# Altium PCB 单相本地卡表_SX-MC6017A-200606.PcbDoc (part 1 of 2)
Units mm, origin at the board's own origin, x right, y up, seen from the top; angles counter-clockwise.
Board outline 98.55 x 94.74 mm, 2 copper layers (Top Layer, Bottom Layer); 169 components, 155 nets, 535 pads, 382 vias.
Unrouted connection lines stored in the file: 1.
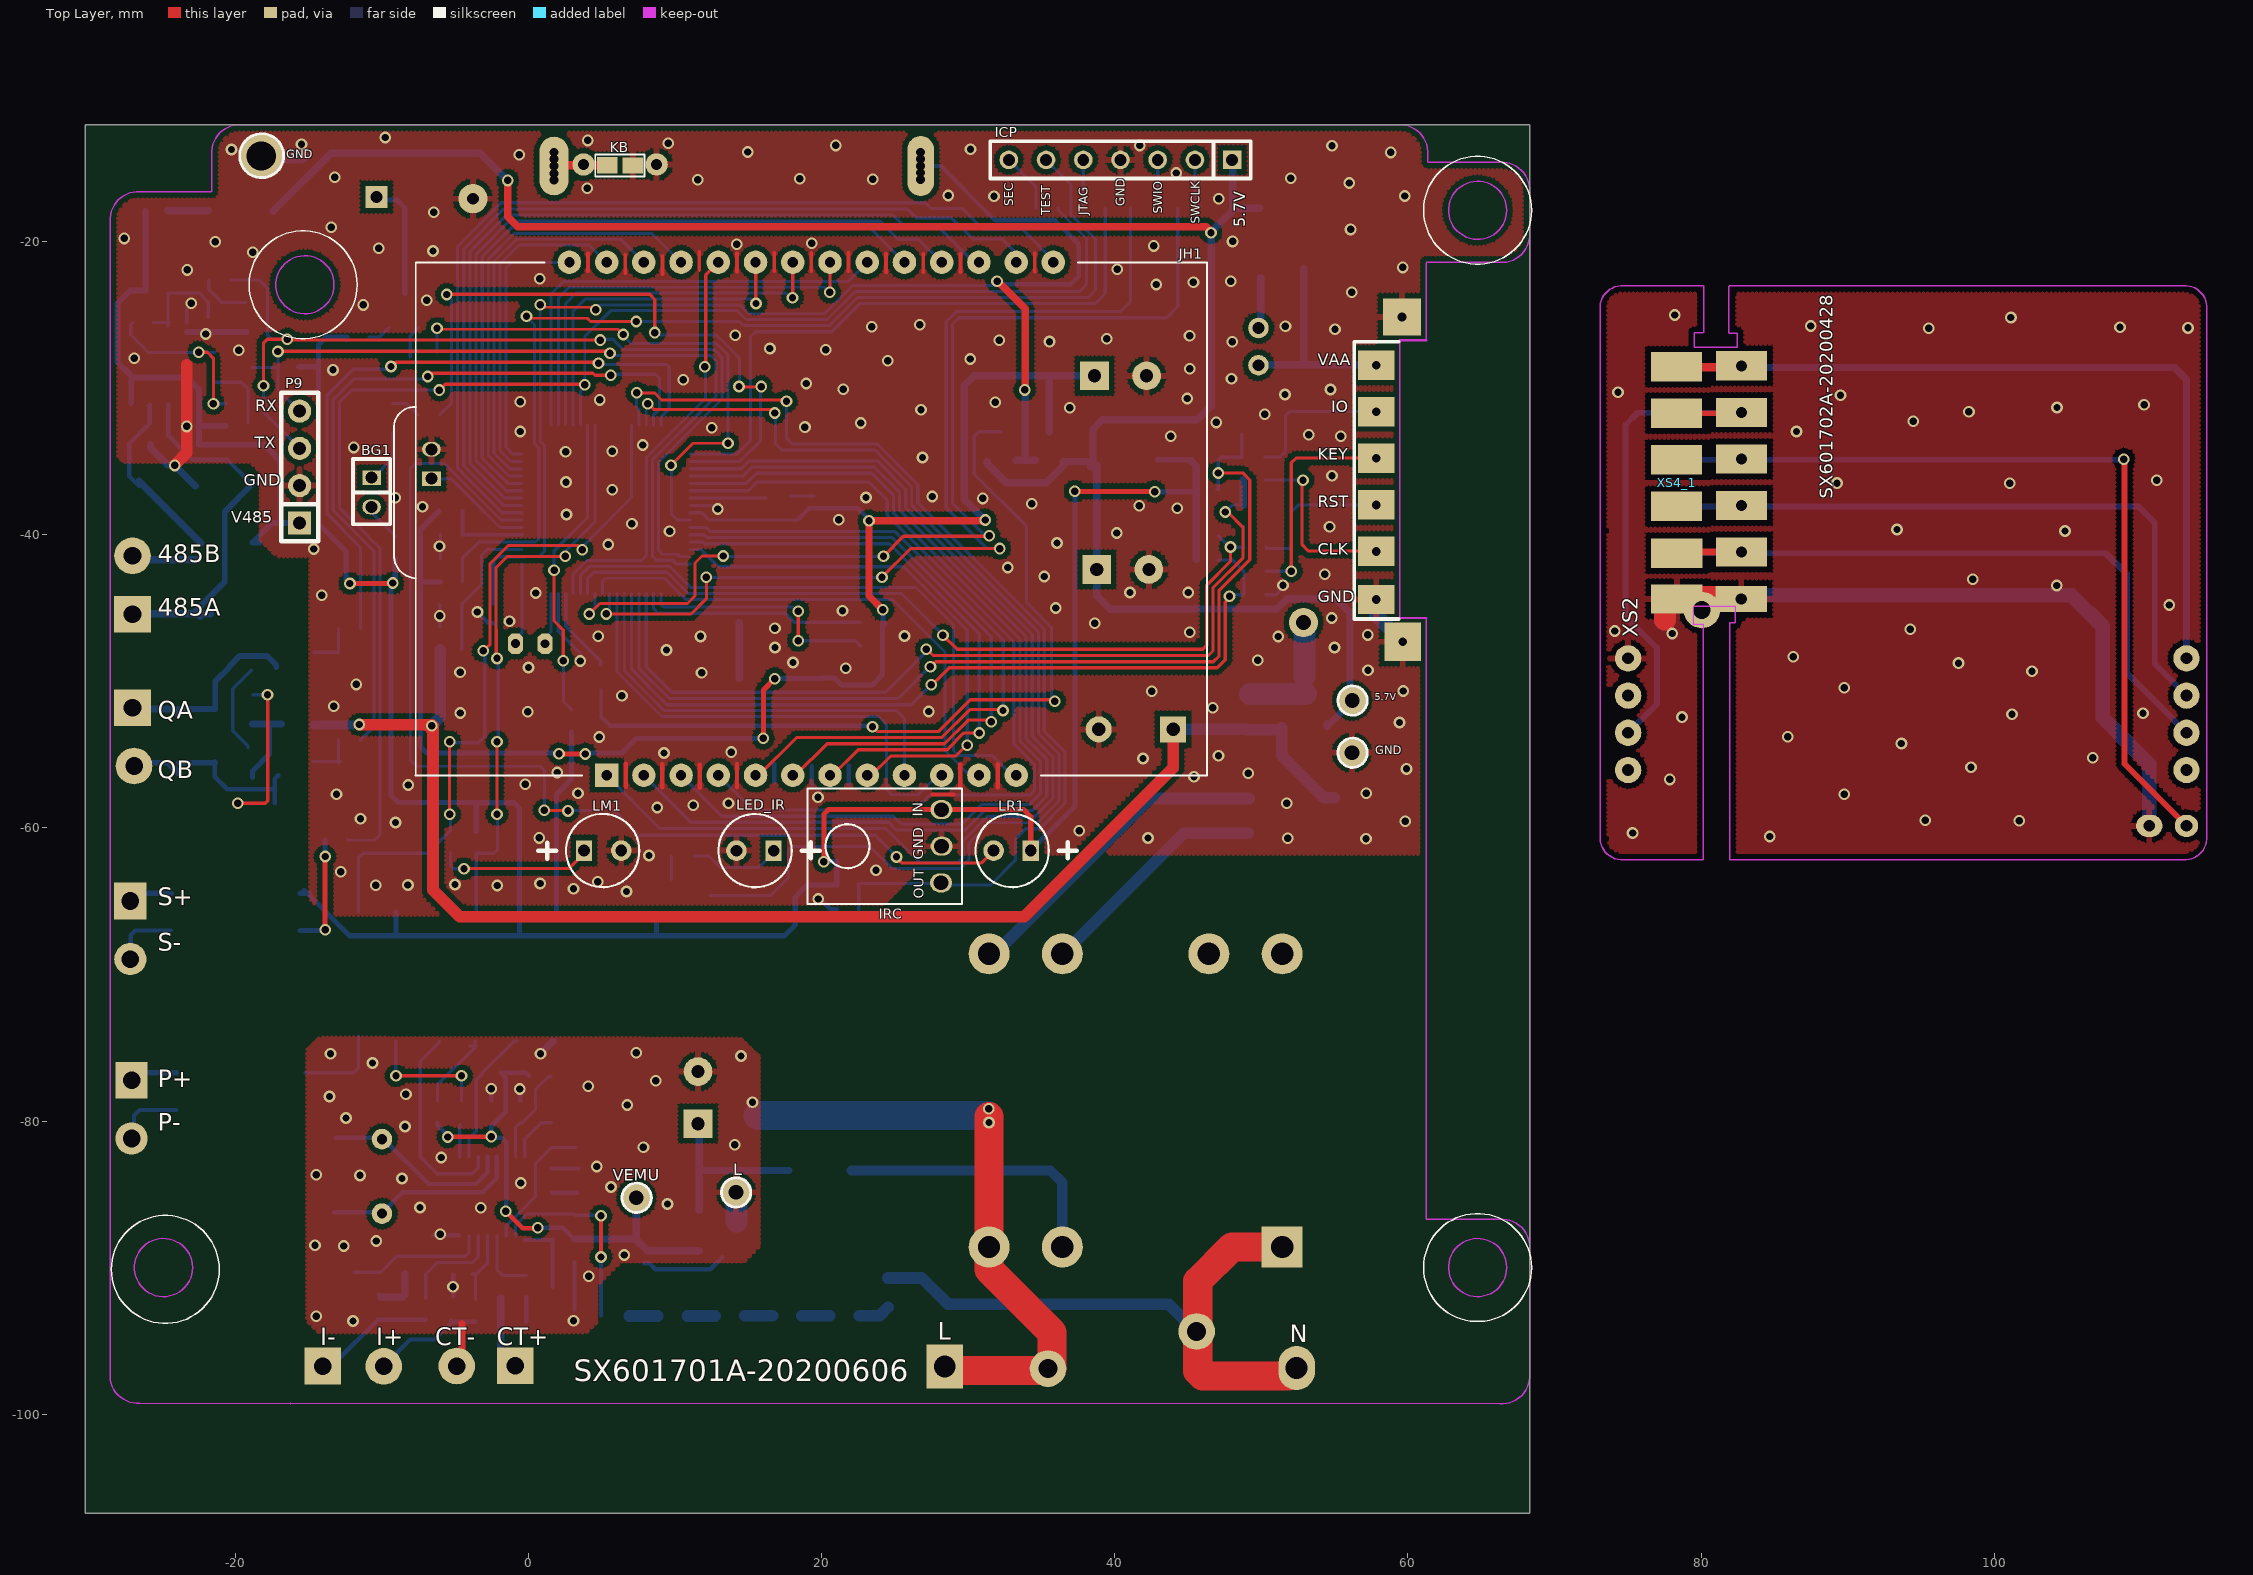
[diagram p0: Top Layer view]
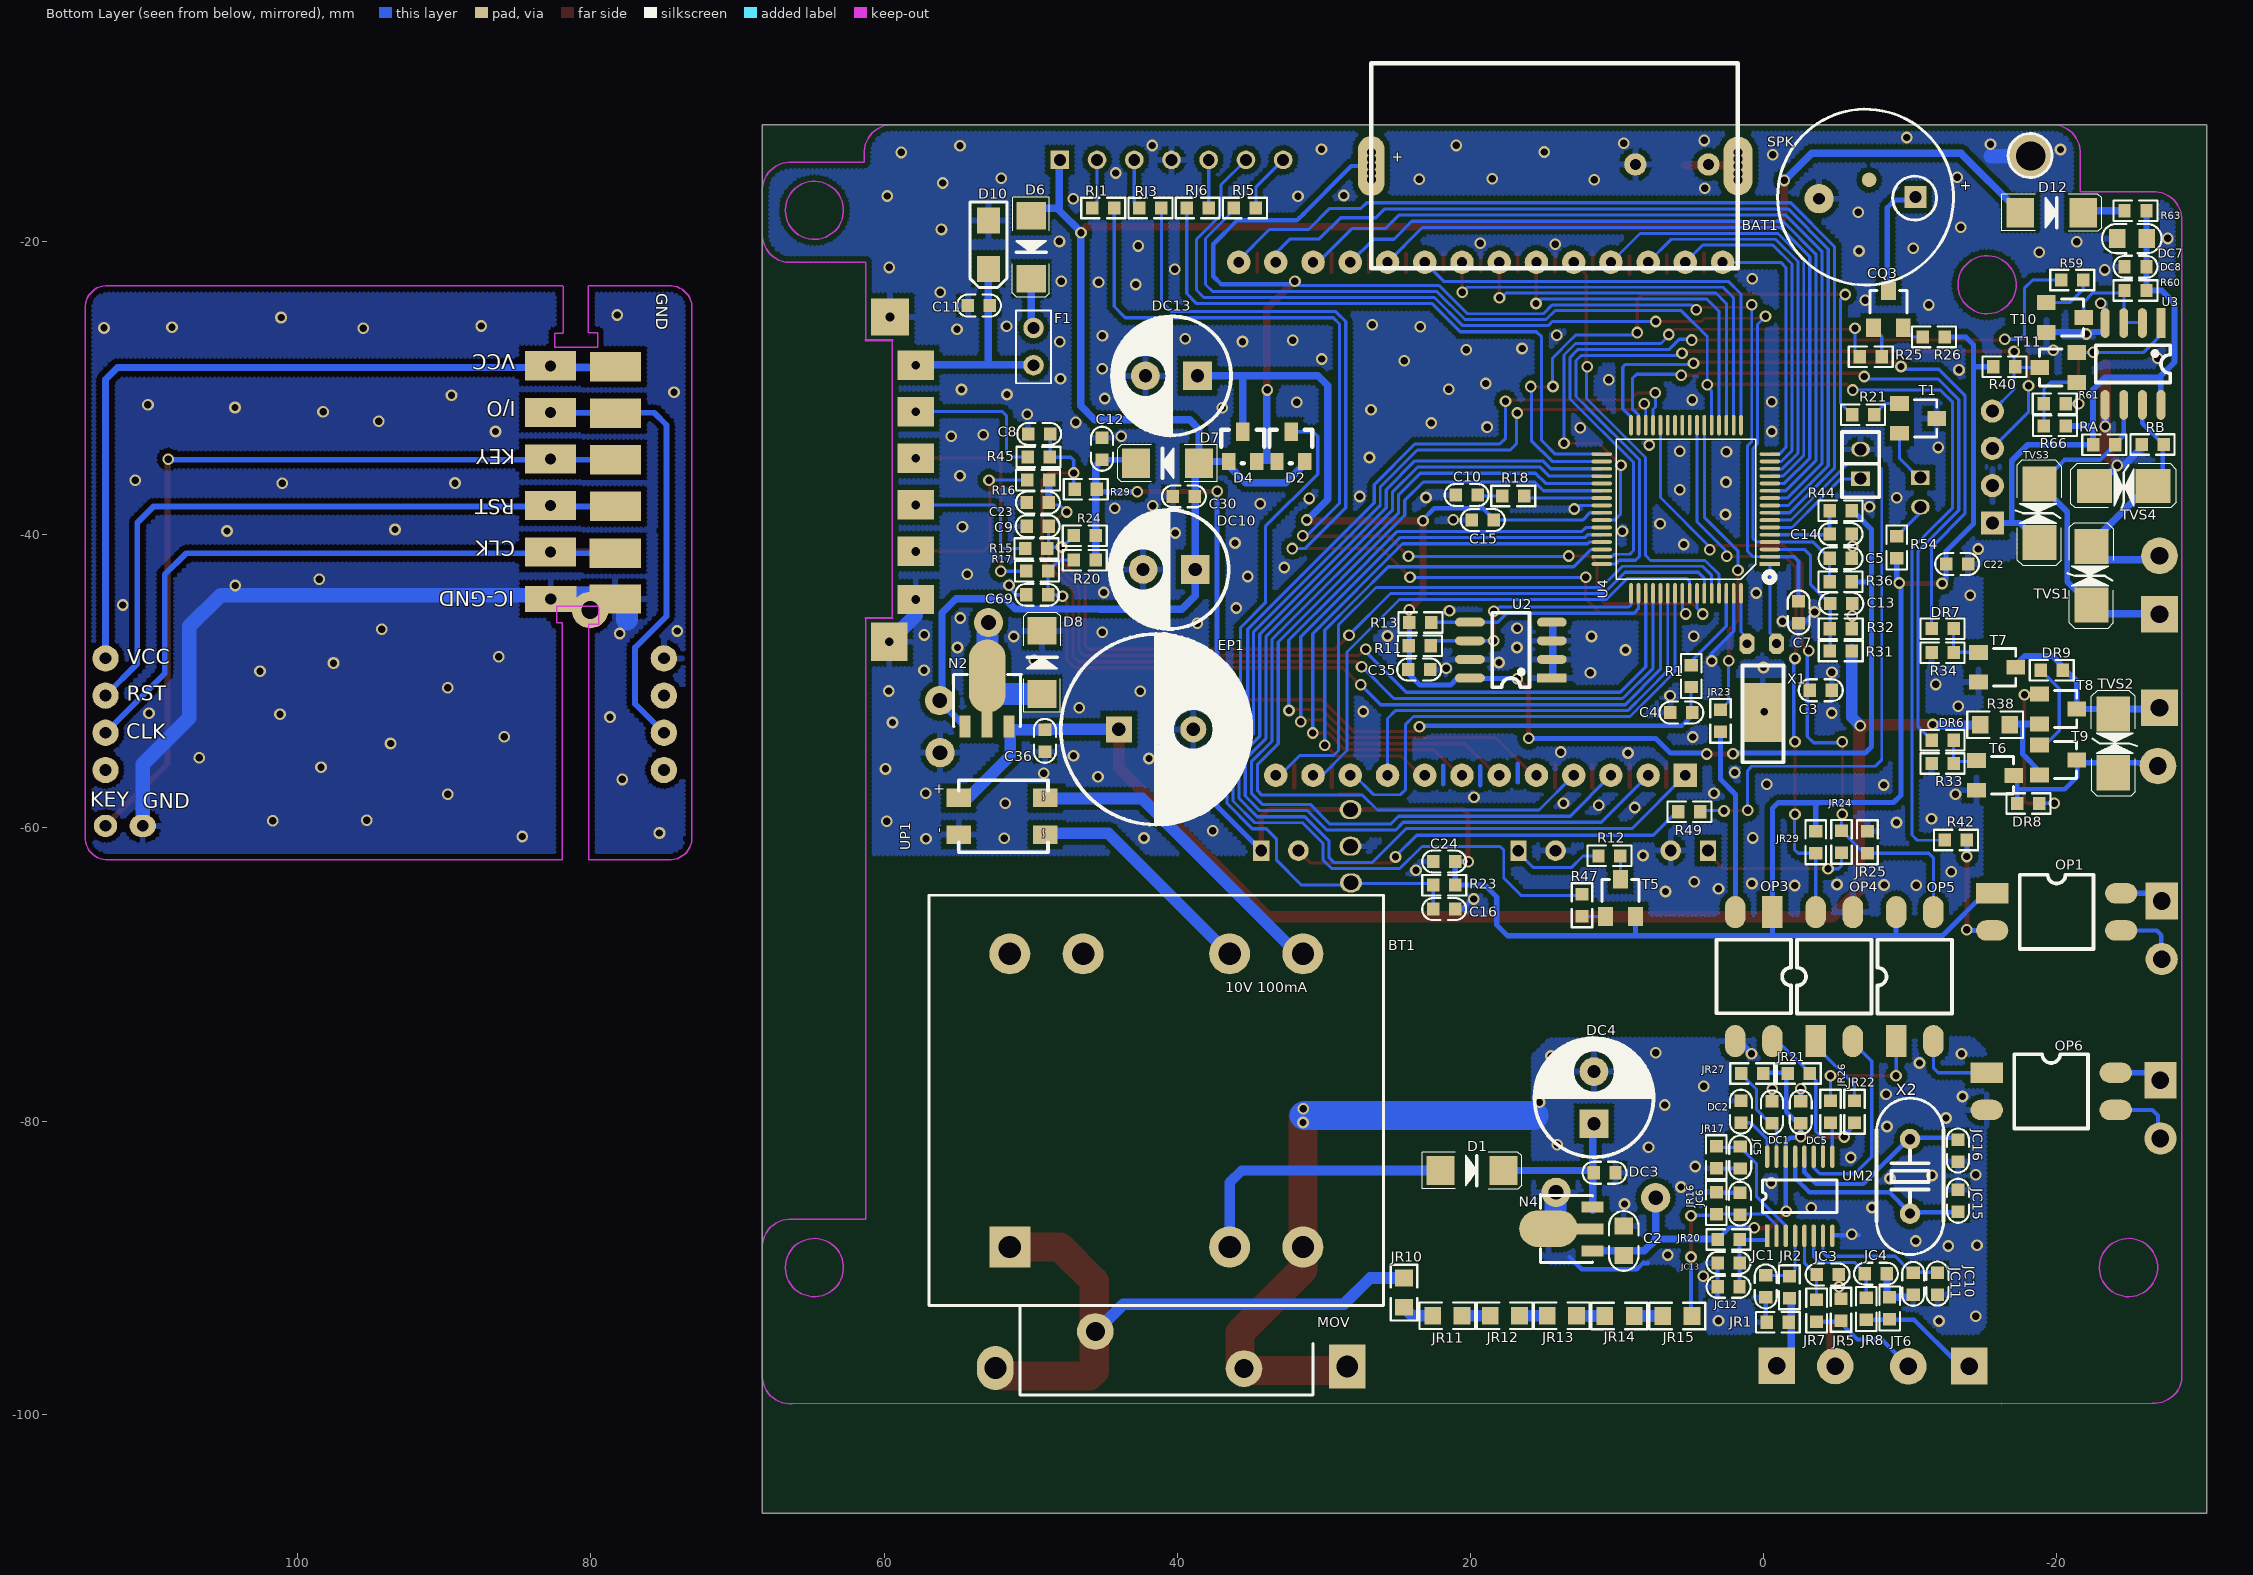
[diagram p1: Bottom Layer view, seen from below]

## Layer stack, top to bottom
Top Layer: signal copper 0.0356
Dielectric: dielectric 0.32, FR-4, Dk 4.8
Bottom Layer: signal copper 0.0356

## Board outline
-30.246,-106.758 68.306,-106.758 68.306,-12.016 -30.246,-12.016

## Design rules (kind name [scope] priority, off if disabled: settings)
Clearance Clearance_1 [InPoly] p1: gap=0.35
Clearance [All] p2: gap=0.2
PolygonConnect PolygonConnect_1 [IsVia] p1: connectstyle=Direct reliefconductorwidth=0.254 reliefentries=4 polygonreliefangle="90 Angle"
PolygonConnect [All] p2: connectstyle=Relief reliefconductorwidth=0.4 reliefentries=4 polygonreliefangle="90 Angle"
RoutingVias [All] p1: holewidth=0.5 width=0.8 viastyle="Through Hole" minholewidth=0.5 minwidth=0.8 maxholewidth=0.5 maxwidth=0.8
SilkscreenOverComponentPads [All] p1: minsilkscreentomaskgap=0.254
SolderMaskExpansion [All] p1: expansion=0.102
Width [All] p1: maxlimit=3 minlimit=0.2 preferedwidth=0.2
27 further rules are at their usual default settings.

## Components (designator, comment, footprint, x,y, rotation, side; value= is the part's Value field where it differs from the comment)
BAT1 "ER14250/无焊脚" BETTER1 26.754,-14.838 r180 bottom
BG1 "Comment" SIP2-2 -10.712,-36.101 r270 top
BT1 "DB-2-04A-10" DB-2-04A 31.419,-68.592 r180 bottom locked
C2 "106/10V" C0805 9.533,-87.166 r270 bottom
C3 "104" C0603 -3.162,-50.603 r180 bottom
C4 "105/16V" C0603 4.852,-52.133 r0 bottom
C5 "0.01uF/50V" C0603 -4.512,-41.603 r180 bottom
C7 "0.1μF/50V" C0603 -2.403,-44.544 r270 bottom
C8 "102" C0603 50.167,-33.119 r180 bottom
C9 "102" C0603 50.272,-39.412 r180 bottom
C10 "0.1μF/50V/X7R" C0603 21,-37.284 r180 bottom
C11 "104/50V" C0603 52.775,-24.356 r0 bottom
C12 "475/10V" C0603 45.125,-33.381 r270 bottom
C13 "0.01uf/50v" C0603 -4.559,-44.696 r180 bottom
C14 "0.1μF/50V/X7R" C0603 -4.512,-39.952 r180 bottom
C15 "0.1μF/50V/X7R" C0603 19.901,-38.993 r180 bottom
C16 "102" C0603 22.531,-65.541 r180 bottom
C22 "0.1μF/50V/X7R" C0603 -12.465,-41.992 r180 bottom
C23 "102" C0603 50.251,-37.804 r180 bottom
C24 "475/10V" C0603 21.03,-62.29 r0 bottom
C30 "0.1μF/50V/X7R" C0603 40.289,-37.376 r180 bottom
C35 "475/10V" C0603 24.236,-49.19 r180 bottom
C36 "0.1μF/50v" C0603 49.024,-54.805 r90 bottom
C69 "102" C0603 50.302,-44.092 r180 bottom
CQ3 "S8550" SOT-23 -8.527,-23.339 r180 bottom
CTC "CON2" PADX2#1 -1.108,-96.695 r180 top
D1 "M7" L-SMD 22.041,-83.373 r180 bottom
D2 "BAV70" BAV70 31.297,-35.123 r0 bottom
D4 "BAV70" BAV70 34.588,-35.128 r0 bottom
D6 "M7" L-SMD 49.966,-18.229 r270 bottom
D7 "M7" L-SMD 38.51,-35.118 r0 bottom
D8 "M7" L-SMD 49.221,-50.851 r90 bottom
D10 "TCLLZ5V6" LL-34 52.879,-18.552 r270 bottom
D12 "M7" L-SMD -17.526,-18.019 r180 bottom
DC1 "0.1μF/50V/X7R" C0603 -0.582,-78.652 r270 bottom
DC2 "0.1μF/50V/X7R" C0603 1.54,-80.109 r90 bottom
DC3 "0.01μF/50V" C0603 11.592,-83.528 r180 bottom
DC4 "100μF/25V/RD" 3.5×8×11.5 11.562,-80.177 r90 bottom
DC5 "0.1μF/50V/X7R" C0603 -2.546,-80.143 r90 bottom
DC7 "475/10v" C0805 -26.145,-19.787 r0 bottom
DC8 "0.1uf/50V/X7R" C0603 -26.136,-21.714 r0 bottom
DC10 "RD/10V/220μF" 3.5×8×11.5 38.766,-42.364 r0 bottom
DC13 "RD/10V/220μF" 3.5×8×11.5 38.61,-29.154 r0 bottom
DR6 "1K" 0603 -12.973,-54.021 r0 bottom
DR7 "1K" 0603 -11.473,-46.401 r180 bottom
DR8 "2K" 0603 -17.33,-58.329 r180 bottom
DR9 "2K" 0603 -20.425,-49.246 r0 bottom
EP1 "RD/25V/1000" 5.0×12.5×20 41.439,-53.273 r180 bottom
F1 "MZ11-06A300-600RM" CON2 49.798,-27.158 r90 bottom
FLQ "CON2" PADX2#2 -27.088,-80.722 r90 top
FLQ "CON2" PADX2#2 -27.173,-68.482 r90 top
FLQ "CON2" PADX2#3 -10.186,-96.695 r180 top
ICP "CON7" SIP7 48.007,-14.419 r180 top
IRC "IRM-3638J7F116-L(CLW)-698/HS0038B" RECEIVER 24.948,-61.244 r90 top locked
JC1 "0.01/50V" C0603 -0.161,-90.532 r270 bottom
JC3 "103/50V" C0603 -3.631,-90.47 r180 bottom
JC4 "103/50V" C0603 -8.426,-90.415 r0 bottom
JC5 "103/50V" C0603 1.587,-83.236 r90 bottom
JC6 "103/50V" C0603 1.602,-86.383 r90 bottom
JC10 "0.1μF/50V/X7R" C0603 -11.871,-91.839 r90 bottom
JC11 "475/10V" C0603 -10.218,-91.857 r90 bottom
JC12 "475/10V" C0603 3.132,-91.309 r180 bottom
JC13 "0.1μF/50V/X7R" C0603 1.631,-89.679 r0 bottom
JC15 "22pF/25V" C0603 -13.279,-84.689 r270 bottom
JC16 "22pF/25V" C0603 -13.271,-81.26 r270 bottom
JH1 "液晶GV17980A-HPP-WG Model" "GV17980A-HPP-WG MODEL" -7.703,-56.417 r0 top locked
JR1 "5R1/1%" 0603 -0.234,-93.724 r180 bottom
JR2 "1K/1%" 0603 -1.772,-90.591 r270 bottom
JR5 "100R/1%" 0603 -5.289,-93.623 r90 bottom
JR7 "1K/1%" 0603 -3.627,-93.682 r90 bottom
JR8 "1K/1%" 0603 -7.021,-93.566 r90 bottom
JR10 "200K/1%" 0805 24.523,-92.708 r90 bottom
JR11 "200K/1%" 0805 20.56,-93.279 r0 bottom
JR12 "200K/1%" 0805 16.647,-93.286 r0 bottom
JR13 "200K/1%" 0805 12.748,-93.286 r0 bottom
JR14 "200K/1%" 0805 10.823,-93.3 r180 bottom
JR15 "200K/1%" 0805 4.873,-93.3 r0 bottom
JR16 "1.2K/1%" 0603 3.211,-86.347 r90 bottom
JR17 "1.2K/1%" 0603 3.211,-83.222 r90 bottom
JR20 "10R" 0603 1.631,-88.082 r0 bottom
JR21 "680R" 0603 -3.163,-76.75 r0 bottom
JR22 "1K" 0603 -6.216,-78.609 r270 bottom
JR23 "1K" 0603 2.933,-51.943 r270 bottom
JR24 "3K" 0603 -5.332,-60.199 r270 bottom
JR25 "10K" 0603 -7.093,-60.229 r270 bottom
JR26 "1K" 0603 -4.57,-78.609 r270 bottom
JR27 "10K" 0603 1.511,-76.75 r180 bottom
JR29 "680R" 0603 -3.57,-61.729 r90 bottom
JT6 "100R/1%" 0603 -8.61,-93.529 r90 bottom
KB "JD" JD 7.012,-14.804 r180 top
L "1PIN" PAD#1 28.395,-96.735 r90 bottom
LED_IR "IRM-3638J7F116-L(CLW)/TSAL6200" LED-3 15.461,-61.547 r180 top locked
LM1 "LED5红" LED-3 5.045,-61.547 r0 top locked
LR1 "LED5黄" LED-3 33.007,-61.543 r180 top locked
MOV "20K681" MOV-20+ 46.037,-94.389 r180 bottom
N "1PIN" PAD#2 52.401,-96.848 r90 bottom
N2 "SE8801BH-SOT-23" 8801#1 54.471,-53.082 r180 bottom (schematic designator N4)
N4 "SE8801BH-SOT-23" 8801#2 11.662,-88.859 r90 bottom
OP1 "816S(D档)" SMD-4 -15.606,-64.457 r180 bottom
OP3 "816S(D档)" SMD-4 -0.615,-65.74 r270 bottom
OP4 "816S(D档)" SMD-4 -3.566,-74.54 r90 bottom
OP5 "816S(D档)" SMD-4 -9.057,-74.54 r90 bottom
OP6 "816S(D档)" SMD-4 -15.239,-76.702 r180 bottom
P9 "RS485_XH-04" IDC4 -15.62,-39.184 r90 top
R1 "10R" 0603 4.925,-50.385 r90 bottom
R11 "5.1K" 0603 24.19,-47.572 r180 bottom
R12 "101" 0603 9.754,-61.906 r0 bottom
R13 "5.1K" 0603 24.156,-45.984 r180 bottom
R15 "681" 0603 48.855,-40.935 r0 bottom
R16 "681" 0603 48.742,-36.267 r0 bottom
R17 "1K" 0603 48.81,-42.479 r0 bottom
R18 "100R" 0603 16.32,-37.354 r0 bottom
R20 "20K" 0603 45.558,-41.728 r0 bottom
R21 "5.1K" 0603 -6.051,-31.806 r180 bottom
R23 "10k" 0603 21.031,-63.903 r0 bottom
R24 "20K" 0603 45.558,-40.057 r0 bottom
R25 "3K" 0603 -6.569,-27.854 r180 bottom
R26 "51R" 0603 -10.879,-26.497 r180 bottom
R29 "20K" 0603 45.488,-36.893 r0 bottom
R31 "75K/1%" 0603 -4.522,-47.932 r180 bottom
R32 "12K/1%" 0603 -6.022,-46.407 r0 bottom
R33 "3K" 0603 -12.973,-55.599 r0 bottom
R34 "3K" 0603 -11.473,-48.04 r180 bottom
R36 "1K" 0603 -4.512,-43.209 r180 bottom
R38 "20R" 0805 -14.803,-52.955 r180 bottom
R40 "5.1k" 0603 -15.69,-28.533 r180 bottom
R42 "1.2K" 0603 -12.381,-60.825 r180 bottom
R44 "5.1K" 0603 -4.512,-38.361 r180 bottom
R45 "681" 0603 48.705,-34.687 r0 bottom
R47 "3K" 0603 12.383,-64.528 r270 bottom
R49 "3K" 0603 4.3,-58.898 r0 bottom
R54 "510R" 0603 -9.099,-40.111 r270 bottom (schematic designator R21)
R59 "5.1k" 0603 -20.32,-22.613 r180 bottom
R60 "10k" 0603 -24.636,-23.332 r180 bottom
R61 "5.1k" 0603 -19.129,-31.064 r180 bottom (schematic designator R66)
R63 "10R" 0603 -26.136,-17.894 r0 bottom
R66 "5.1k" 0603 -19.138,-32.566 r180 bottom
RA "10K" 0603 -23.998,-33.854 r0 bottom
RB "10K" 0603 -25.799,-33.84 r180 bottom
REAY1 "继电器HEF19-90" PADX2#4 -27.023,-41.435 r270 top
REAY1 "继电器HEF19-90" PADX2#5 -27.023,-55.3 r90 top
RJ1 "100R" 0603 44.297,-17.704 r0 bottom
RJ3 "100R" 0603 41.075,-17.704 r0 bottom
RJ5 "100R" 0603 34.63,-17.704 r0 bottom
RJ6 "100R" 0603 37.853,-17.704 r0 bottom
SPK "HYT-1205_5V有源一体" FM -6.964,-16.961 r270 bottom
T1 "2SA812" SOT-23 -11.826,-32.055 r270 bottom
T5 "2SA812" SOT-23 9.754,-63.504 r180 bottom
T6 "L8050HQ" SOT-23 -17.076,-56.411 r270 bottom
T7 "L8050HQ" SOT-23 -17.215,-49.034 r270 bottom
T8 "L8550HQ" SOT-23 -21.377,-51.887 r270 bottom
T9 "L8550HQ" SOT-23 -21.374,-55.363 r270 bottom
T10 "L8050HQ" SOT-23 -21.847,-25.171 r270 bottom
T11 "L8050HQ" SOT-23 -18.847,-28.581 r90 bottom
TVS1 "SMBJ8.5CA" 3528 -22.377,-40.796 r270 bottom
TVS2 "SMBJ24CA" 3528 -23.87,-56.232 r90 bottom
TVS3 "SMBJ5.0CA" 3528 -18.833,-36.523 r270 bottom
TVS4 "SMBJ5.0CA" 3528 -22.579,-36.667 r180 bottom
U2 "BM24C16" SO-8 17.217,-47.805 r0 bottom
U3 "485芯片/有极性" SO-8 -25.158,-28.33 r270 bottom
U4 "HT6017" STM8 -0.445,-41.996 r90 bottom (schematic designator U1)
UM2 "HT7017" SOP16-7059 -0.256,-87.829 r90 bottom
UP1 "MB6S" "MB1S -MB6S_SOIC-4" 49.006,-60.453 r90 bottom
X1 "32768Hz" XTAL2 0.896,-47.722 r180 bottom
X2 "6MHz" XTAL1-3 -9.988,-83.78 r270 bottom
XS2 "U.S.PAT 6.336.588" KZ-1 75.018,-56.048 r90 top
XS4_1 "" SIP6C 76.323,-25.358 r270 top locked
? "MUP-C837" CAR 49.494,-34.879 r270 top
? "Comment" SIP2-2 -6.625,-36.166 r90 bottom

## Footprints (in the part's own frame and the unit in brackets; to place one, negate y for a bottom-side part, rotate by r counter-clockwise, add the part's x,y. Pads: shape width x height; smd on the part's side, far side on the other; paste and mask are expansions set on the pad)
3.5×8×11.5 [mil]
  rect 77x77 hole 35.43: 1(0,0)
  round 77 hole 35.43: 2(140,0)
  silkscreen extent -90,-160 230,160
5.0×12.5×20 [mil]
  rect 70x70 hole 35.43: 1(-100,0)
  round 70 hole 35.43: 2(100,0)
  silkscreen extent -256,-256 256,256
0603 [mm]
  rect 0.85x0.9 smd: 1(0,0) 2(1.5,0)
  silkscreen extent -0.75,-0.7 2.25,0.7
0805 [mm]
  rect 1.14x1.2 smd: 1(0,0) 2(2,0)
  silkscreen extent -0.9,-0.9 2.9,0.9
3528 [mm]
  rect 2.4x2.3 smd: 1(0,0) 2(4,0)
  silkscreen extent -1.6,-1.62 5.6,1.5
8801#1 [mil]
  rect 30x60 smd: 1(0,0) 3(118,0)
  round 0 smd: 2(59,0)
  rect 30x100 smd: 2(59,20)
  oval 98.43x196.85 smd: 2(59.93,135.22)
  silkscreen extent -31,0 151,140
8801#2 [mil]
  rect 30x60 smd: 1(0,0) 3(118,0)
  round 0 smd: 2(59,0)
  rect 30x100 smd: 2(59,20)
  oval 98.43x157.48 smd: 2(59.84,118.11)
  silkscreen extent -31,0 151,140
BAV70 [mil]
  rect 36x45 smd: 1(74.61,-4.91) 3(-0.39,-4.91)
  rect 36x50 smd: 2(36.61,-84.91)
  silkscreen extent -20,-90 95,0
BETTER1 [mil]
  round 24 hole 24: 1(0,19) 1(0,-36) 1(0,-18) 1(0,0) 1(0,37) 2(985,0) 2(985,-20) 2(985,-37) 2(985,37) 2(985,19)
  oval 71x161.42 hole 24: 1(0,0)
  oval 78.74x157.48 hole 24: 2(985,0)
  silkscreen extent 0,-275 984,276
C0603 [mm]
  rect 0.85x0.9 smd: 1(0,0) 2(1.5,0)
  silkscreen extent -0.75,-0.75 2.25,0.75
C0805 [mm]
  rect 1.14x1.27 smd: 1(2,0) 2(0,0)
  silkscreen extent -1.02,-1 3.05,1
CAR [mm]
  rect 2x2.5 hole 0.6: 1(-6.45,8.34) 2(-3.272,8.347) 3(-0.097,8.347) 4(3.078,8.347) 5(6.253,8.347) 6(9.537,8.345)
  silkscreen extent -8.05,6.83 10.87,9.86
CON2 [mm]
  round 1.4 hole 0.8: 1(-1.272,0.003) 2(1.268,0.003)
  silkscreen extent -2.51,-1.2 2.46,1.19
DB-2-04A [mil]
  rect 110x110 hole 60: 1(-787.4,-787.4)
  round 110 hole 60: 2(-196.85,-787.4) 3(0,-787.4) 4(0,0) 5(-196.85,0) 6(-590.55,0) 7(-787.4,0)
  silkscreen extent -1004,-945 217,157
FM [mm]
  rect 1.5x1.5 hole 0.8: 1(-0.012,3.413)
  round 2 hole 0.8: 2(0.108,-3.167)
  silkscreen extent -6,-5.99 6,6
"GV17980A-HPP-WG MODEL" [mm]
  round 1.6 hole 0.7: 1(10.489,35.005) 2(13.029,35.005) 3(15.569,35.005) 4(18.109,35.005) 5(20.649,35.005) 6(23.189,35.005) 7(25.729,35.005) 8(28.269,35.005) 9(30.809,35.005) 10(33.349,35.005) 11(35.889,35.005) 12(38.429,35.005) 13(40.969,35.005) 14(43.509,35.005) 15(40.97,0.004) 16(38.43,0.004) 17(35.89,0.004) 18(33.35,0.004) 19(30.81,0.004) 20(28.27,0.004) 21(25.73,0.004) 22(23.19,0.004) 23(20.65,0.004) 24(18.11,0.004) 25(15.57,0.004)
  rect 1.6x1.6 hole 0.7: 26(13.03,0.004)
  silkscreen extent -1.49,0 54,35.01
IDC4 [mil]
  rect 62x62 hole 35: 1(0,0)
  round 62 hole 35: 2(100,0) 3(200,0) 4(300,0)
  silkscreen extent -50,-50 350,50
JD [mm]
  rect 1.4x1.106 smd: 1(1.652,-0.011) 2(-0.096,0.004)
  silkscreen extent -0.89,-0.76 2.46,0.74
KZ-1 [mm]
  round 1.8 hole 0.8: 1(0,0) 2(2.54,0) 3(5.08,0) 4(7.62,0) 6(0,-38.1) 7(2.54,-38.1) 8(5.08,-38.1) 9(7.62,-38.1)
  oval 1.5x1.6 hole 0.8: 5(-3.81,-38.1)
  oval 1.5x1.8 hole 0.8: 11(-3.81,-35.56)
L-SMD [mm]
  rect 1.9x2 smd: A(0,0) K(4.3,0)
  silkscreen extent -1.25,-1.27 5.55,1.25
LED-3 [mm]
  rect 1.1x1.4 hole 0.8: A(-1.26,0.002)
  round 1.4 hole 0.8: K(1.28,0.002)
  silkscreen extent -4.39,-2.5 2.51,2.5
LL-34 [mil]
  rect 70x62 smd: 1(0,0) 2(130,0)
  silkscreen extent -50,-50 180,50
"MB1S -MB6S_SOIC-4" [mm]
  rect 1.254x1.654 smd: 1(0,0) 2(2.5,0) 3(2.5,5.9) 4(0,5.9)
  silkscreen extent -1.2,-0.2 3.7,5.9
MOV-20+ [mm]
  round 2.5 hole 1.3: 1(0.453,0.034) 2(10.6,-2.5)
  silkscreen extent -4.7,-4.3 15.31,1.8
PAD#1 [mm]
  rect 3x2.5 hole 1.5: 1(0,0)
PAD#2 [mm]
  oval 3x2.5 hole 1.5: 1(0,0)
PADX2#1 [mm]
  rect 2.5x2.5 hole 1.2: 1(-0.199,0.002)
  round 2.5 hole 1.2: 2(3.795,0.021)
PADX2#2 [mm]
  round 2.2 hole 1.2: 1(-0.468,0)
  rect 2.5x2.2 hole 1.2: 2(3.5,0)
PADX2#3 [mm]
  round 2.5 hole 1.2: 1(-0.304,0.04)
  rect 2.5x2.5 hole 1.2: 2(3.86,0.021)
PADX2#4 [mm]
  round 2.5 hole 1.2: 1(0,0)
  rect 2.5x2.5 hole 1.2: 2(3.994,0)
PADX2#5 [mm]
  round 2.5 hole 1.2: 1(-0.476,-0.106)
  rect 2.5x2.5 hole 1.2: 2(3.5,0)
RECEIVER [mm]
  oval 1.3x1.5 hole 1: 1(-2.503,-3.193) 2(-0.003,-3.229) 3(2.492,-3.223)
  silkscreen extent -3.94,-4.63 3.93,5.91
SIP2-2 [mm]
  rect 1x1.27 hole 0.813: 1(0,0)
  oval 1x1.27 hole 0.813: 2(2,0)
  silkscreen extent -1.27,-1.27 3.18,1.27
SIP6C [mm]
  rect 2.03x3.5 all layers, no hole: 1(15.9,2.024)
  rect 2.032x3.5 all layers, no hole: 2(12.7,2) 3(9.525,2) 4(6.35,2) 5(3.175,2)
  rect 2x3.5 all layers, no hole: 6(19.018,2.024)
SIP7 [mil]
  rect 50x50 hole 32: 1(0,0)
  round 50 hole 32: 2(100,0) 3(200,0) 4(300,0) 5(400,0) 6(500,0) 7(600,0)
  silkscreen extent -50,-50 650,50
SMD-4 [mm]
  rect 2.2x1.4 smd: 1(0,0)
  oval 2.2x1.4 smd: 2(0,-2.54) 3(8.8,-2.54) 4(8.8,0)
  silkscreen extent 1.88,-3.81 6.91,1.27
SO-8 [mil]
  rect 80x24 smd: 1(-109.45,77.42)
  oval 80x24 smd: 2(-109.45,27.42) 3(-109.45,-22.58) 4(-109.45,-72.58) 5(110.55,-72.58) 6(110.55,-22.58) 7(110.55,27.42) 8(110.55,77.42)
  silkscreen extent -49,-98 51,102
SOP16-7059 [mm]
  rect 1.54x0.3 smd: 1(0,0)
  oval 1.54x0.3 smd: 2(0,-0.635) 3(0,-1.27) 4(0,-1.905) 5(0,-2.54) 6(0,-3.175) 7(0,-3.81) 8(0,-4.445) 9(5.4,-4.445) 10(5.4,-3.81) 11(5.4,-3.175) 12(5.4,-2.54) 13(5.4,-1.905) 14(5.4,-1.27) 15(5.4,-0.635) 16(5.4,0)
  silkscreen extent 1.6,-4.76 3.8,0.32
SOT-23 [mil]
  rect 40x50 smd: B(-40,-100) C(0,0) E(40,-100)
  silkscreen extent -50,-60 50,0
STM8 [mm]
  rect 0.254x1.4 smd: 1(0,0)
  oval 0.254x1.4 smd: 2(0.5,0) 3(1,0) 4(1.5,0) 5(2,0) 6(2.5,0) 7(3,0) 8(3.5,0) 9(4,0) 10(4.5,0) 11(5,0) 12(5.5,0) 13(6,0) 14(6.5,0) 15(7,0) 16(7.5,0) 33(7.5,11.475) 34(7,11.475) 35(6.5,11.475) 36(6,11.475) 37(5.5,11.475) 38(5,11.475) 39(4.5,11.475) 40(4,11.475) 41(3.5,11.475) 42(3,11.475) 43(2.5,11.475) 44(2,11.475) 45(1.5,11.475) 46(1,11.475) 47(0.5,11.475) 48(0,11.475)
  oval 1.4x0.254 smd: 17(9.475,1.975) 18(9.475,2.475) 19(9.475,2.975) 20(9.475,3.475) 21(9.475,3.975) 22(9.475,4.475) 23(9.475,4.975) 24(9.475,5.475) 25(9.475,5.975) 26(9.475,6.475) 27(9.475,6.975) 28(9.475,7.475) 29(9.475,7.975) 30(9.475,8.475) 31(9.475,8.975) 32(9.475,9.475) 49(-2,9.475) 50(-2,8.975) 51(-2,8.475) 52(-2,7.975) 53(-2,7.475) 54(-2,6.975) 55(-2,6.475) 56(-2,5.975) 57(-2,5.475) 58(-2,4.975) 59(-2,4.475) 60(-2,3.975) 61(-2,3.475) 62(-2,2.975) 63(-2,2.475) 64(-2,1.975)
  silkscreen extent -1.23,-0.31 8.5,10.5
XTAL1-3 [mm]
  round 1.4 hole 0.7: 1(-2.547,0.014) 2(2.533,0.014)
  silkscreen extent -5.34,-2.27 5.33,2.3
XTAL2 [mm]
  oct 1x1.4 hole 0.6: 1(1.79,0.302) 2(-0.228,0.292)
  rect 3x4 smd: 3(0.852,-4.403)
  silkscreen extent -0.54,-7.8 2.26,-1.2

## Part data
BAT1: library part BATTERY1, "电池"
BT1: "32181"
C2 DC4 DC10 DC13 EP1: library part CAPACITOR_2, "电解电容"
C3 C4 C5 C7 C10 C11 C12 C13 C14 C15 C16 C22 C24 C30 C35 C36 DC1 DC2 DC3 DC5 DC7 DC8 JC1 JC3 JC4 JC5 JC6 JC10 JC11 JC12 JC13 JC15 JC16: library part CAP, "电容"
C8 C9 C23 C69: library part CAP, "Capacitor"
CQ3 T9: library part PNP
CTC FLQ FLQ FLQ ICP: "Connector"
D1 D6 D7 D8 D12: library part DIODE, "二极管"
D2 D4: "Diode AKA"
D10: library part "DIODE TUNNEL", "Diode Tunnel"
DR6 DR7 DR8 DR9 R21 R24 R25 R26 R29 R33 R34 R38 R54 R61 R66: library part RES
F1: library part VARISTOR
IRC: library part HS0038B, "红外接收管"
JH1: library part TS-H-0716S
JR1 JR2 JR5 JR7 JR8 JR10 JR11 JR12 JR13 JR14 JR15 JR16 JR17 JR20 JR21 JR22 JR23 JR24 JR25 JR26 JR27 JR29 JT6 R1 R11 R12 R13 R15 R16 R17 R18 R20 R23 R31 R32 R36 R40 R42 R44 R45 R47 R49 R59 R60 R63 RA RB RJ1 RJ3 RJ5 RJ6: library part RES2, "电阻"
LED_IR: library part LAMP, "红外发光管"
LM1 LR1: library part LED, "发光二极管"
MOV: library part RES4, "压敏电阻"
N2 N4: library part LM80L05
OP1 OP3 OP4 OP5 OP6: library part OPTOISO1, "光耦"
P9: library part CON4, "Connector"
REAY1 REAY1: library part CON2, "HFE19-90"
SPK: library part BEEP, "蜂鸣器"
T1 T5: library part PNP, "PNP三极管"
T6 T7 T10 T11: library part NPN
T8: library part PNP, "PNP"
TVS1 TVS2 TVS3 TVS4: library part TVS1, "TVS管"
U2: library part 24C04
U3: library part SP485_1, "485收发芯片"
U4: library part μPD78F0537_1, "单片机HT6017"
UM2: "计量芯片"
UP1: "桥堆"
X1: library part CRYSTAL, "晶振"

## Free pads (board coordinates)
  round 3 hole 2: 0(-18.234,-14.15)
  round 1 smd far side mask+0.762: 0(-7.209,-15.783)
  round 2 hole 1: 0(7.356,-85.234) 0(14.151,-84.861) 0(52.871,-45.986) 0(56.179,-54.863) 0(56.202,-51.31)
  round 2.5 hole 1.2: 0(80.051,-45.133)
  rect 3.5x1.8 hole 0.762: 0(82.738,-44.376)
  round 1.524 hole 0.762: 1(3.752,-14.734) 1(8.737,-14.731)
  rect 3.5x2 hole 0.762: 1(82.758,-28.476) 2(82.758,-34.826) 3(82.758,-38.001) 4(82.758,-41.176) 5(82.758,-31.651)
  rect 2.6x2.5 hole 0.6: 2(59.601,-25.135)
  rect 2.5x2.6 hole 0.6: 2(59.642,-47.294)

## Via types
v1: diameter 0.8, hole 0.5, Top Layer to Bottom Layer, 380 vias
v2: diameter 0.8, hole 0.5, Top Layer to Bottom Layer, tented both sides, 2 vias

## Nets (pads, with @x,y where several pads share a name; then routed paths per layer and width w, separated by ;. In a path a pad name is that pad's centre, name@x,y a point inside that pad or via, vN(x,y) a via of type N, cw(c..) or ccw(c..) an arc to the next point about the centre after c; other vN are vias at no path point)
5.7V: C30.2 D2.3 D4.1 D6.A D7.A D12.A DC10.1 ICP.1 N2.1 pad.0@56.202,-51.31 | length 144.7
  Top Layer w0.5: v1@-1.418,-15.838 v1@-1.412,-15.844 ; v1(-1.412,-15.819) v1@-1.412,-15.844 ; v1@46.617,-19.347 46.245,-18.975 25.93,-18.975 -0.747,-18.975 -1.412,-18.309 v1@-1.412,-15.844
  Bottom Layer w0.5: D12.A@-17.444,-17.936 -13.472,-13.964 ; -13.489,-13.964 -13.472,-13.964 ; -13.468,-13.96 -13.472,-13.964 ; v1@-1.315,-15.941 -3.292,-13.964 -13.472,-13.964 ; D2.3@31.287,-34.998 31.287,-35.149 32.593,-36.456 35.317,-36.456 D4.1@36.694,-35.078 ; D4.1@36.483,-35.003 D7.A@38.395,-35.003 ; D7.A@38.366,-35.374 D7.A@38.766,-35.374 ; D7.A@38.51,-35.118 38.51,-32.787 39.142,-32.155 45.623,-32.155 ; D7.A@38.766,-35.251 D7.A@38.766,-35.374 ; 45.651,-32.136 46.585,-31.203 v1@46.585,-19.387 ; v1@46.585,-19.328 48.038,-17.874 ICP.1@48.038,-14.419 ; ICP.1@48,-14.323 ICP.1@48.038,-14.361 ; 48.194,-17.719 D6.A@49.908,-17.719 ; N2.1@54.471,-52.894 N2.1@54.471,-53.082 pad.0@56.046,-51.507 ; pad.0@56.022,-51.491 pad.0@56.202,-51.31 ; pad.0@56.046,-51.376 56.046,-45.322 55.087,-44.362 51.756,-44.362 51.058,-45.059 45.318,-45.059 45.295,-45.082 39.694,-45.082 38.766,-44.154 DC10.1@38.766,-42.364 D7.A@38.766,-35.374
  other v1: 46.566,-19.387
485RX: P9.4 R40.2 T11.C U4.48 | length 54.9
  Top Layer w0.22: v1@-17.301,-27.47 v1@-17.235,-27.47 ; v1@-17.253,-27.452 v1@-17.236,-27.47 ; v1@5.421,-27.47 -17.063,-27.47 v1@-17.236,-27.47
  Bottom Layer w0.2: v1@5.445,-27.606 5.599,-27.76 12.423,-27.76 12.779,-28.116 12.779,-30.562 12.092,-31.249
  Bottom Layer w0.22: T11.C@-18.847,-28.581 R40.2@-17.238,-28.581 ; v1@-17.19,-27.349 -17.325,-27.484 -17.257,-27.484 -17.102,-27.638 -17.102,-28.621 -17.097,-28.627 -17.097,-30.087 P9.4@-15.62,-31.564 ; U4.48@11.03,-41.996 10.104,-41.996 9.843,-41.735 8.729,-41.735 8.454,-41.461 8.454,-34.887 12.092,-31.249
  other v1: 5.556,-27.618 -17.102,-27.492
485TX: P9.3 R59.1 U4.47 | length 65.2
  Top Layer w0.22: v1@-18.082,-29.943 v1(-18.082,-29.821) -18.082,-26.896 -17.841,-26.654 v1(-16.457,-26.654) ; v1@-16.491,-26.718 v1@4.995,-26.718
  Bottom Layer w0.2: U4.47@11.03,-41.496 10.353,-41.496 10.182,-41.325 9.127,-41.325 8.864,-41.062 8.864,-35.057 13.189,-30.732 13.189,-29.299
  Bottom Layer w0.22: R59.1@-20.32,-22.613 -18.362,-22.613 -17.817,-23.158 -17.817,-26.349 -17.511,-26.654 v1(-16.457,-26.654) ; v1@-18.082,-29.866 -18.082,-31.642 P9.3@-15.62,-34.104 ; v1@4.703,-26.71 v1@4.897,-26.71 ; v1@4.897,-26.651 5.729,-26.651 6.428,-27.35 12.64,-27.35 12.747,-27.457 12.752,-27.457 13.189,-27.894 13.189,-29.299
  other v1: 4.892,-26.715
7816CLK: C23.2 R16.1 U4.51 | length 59.9
  Top Layer w0.22: v1@27.156,-47.781 27.611,-48.236 46.387,-48.236 46.695,-47.928 46.695,-43.609 48.75,-41.554 48.75,-39.506 v1@47.725,-38.481
  Bottom Layer w0.22: U4.51@8.03,-43.996 8.03,-48.998 9.782,-50.75 24.363,-50.75 27.087,-48.026 v1@27.087,-47.77 ; v1(47.53,-38.439) 47.995,-37.974 C23.2@48.756,-37.974
  Bottom Layer w0.5: C23.2@48.756,-37.974 R16.1@48.756,-36.239
  other v1: 27.142,-47.811
a1: U4.1 X1.1 | length 5.6
  Bottom Layer w0.22: X1.1@-0.894,-47.42 -0.894,-47.13 -0.445,-46.682 U4.1@-0.445,-41.996
a111: BG1.2 R54.1 | length 2.7
  Bottom Layer w0.22: BG1.2@-10.712,-38.101 -10.712,-38.498 R54.1@-9.099,-40.111
BEEP: R25.1 U4.42 | length 38.4
  Top Layer w0.2: v1@-6.249,-25.976 6.107,-25.976 v1(6.459,-26.329) ; v1(9.723,-35.249) 11.219,-33.753 v1(13.601,-33.753)
  Bottom Layer w0.2: R25.1@-6.261,-27.547 v1@-6.261,-25.877 ; v1@6.339,-26.282 6.997,-26.94 12.81,-26.94 12.917,-27.047 12.922,-27.047 13.599,-27.725 v1@13.599,-33.722 ; v1@9.744,-35.218 9.744,-38.596 10.145,-38.996 U4.42@11.03,-38.996 10.324,-38.996
  other v1: -6.249,-25.913
BKLT: R21.1 U4.34 | length 45.4
  Top Layer w0.2: v1@14.353,-29.904 v1@15.837,-29.904
  Top Layer w0.22: v1(-5.59,-23.608) -5.575,-23.592 8.256,-23.592 8.61,-23.947 v1(8.61,-26.205)
  Bottom Layer w0.2: v1@8.579,-26.205 8.729,-26.355 12.791,-26.355 13.083,-26.647 13.087,-26.647 14.381,-27.94 v1@14.381,-29.896 ; 15.829,-32.889 v1@15.829,-29.879
  Bottom Layer w0.22: R21.1@-6.051,-31.806 -5.261,-31.016 -5.261,-30.22 ; v1@-5.574,-23.608 -5.261,-23.922 -5.261,-30.22 ; -5.261,-29.086 -5.261,-30.22 ; U4.34@11.03,-34.996 14.41,-34.996 15.829,-33.577 15.829,-32.889
  other v1: 15.872,-29.888 14.353,-29.879
CARDIO: C8.2 R29.2 R45.1 U4.52 | length 67.3
  Top Layer w0.22: v1(27.416,-49.005) 27.765,-48.656 46.728,-48.656 47.115,-48.268 47.115,-43.783 49.203,-41.695 49.203,-36.262 48.721,-35.781 v1(47.057,-35.781)
  Bottom Layer w0.22: U4.52@7.53,-43.996 7.53,-49.092 9.608,-51.17 25.215,-51.17 v1@27.383,-49.002 ; R29.2@47.1,-36.893 R29.2@46.988,-36.893 47.057,-36.824 v1(47.057,-35.781) 47.057,-34.921 47.262,-34.716 48.667,-34.716 C8.2@48.667,-33.119
CARDKEY: C69.2 R17.1 R20.2 U4.53 | length 56.9
  Top Layer w0.22: v1@27.474,-50.295 28.693,-49.076 46.98,-49.076 47.535,-48.521 47.535,-44.609 v1@47.855,-44.288
  Bottom Layer w0.22: U4.53@7.03,-43.996 7.03,-49.186 9.434,-51.59 26.103,-51.59 v1(27.47,-50.222) ; R20.2@47.058,-41.728 48.059,-41.728 R17.1@48.81,-42.479 C69.2@48.81,-44.083 ; v1@47.924,-44.092 C69.2@48.802,-44.092
  other v1: 47.825,-44.191
CARDRST: C9.2 R15.1 R24.2 U4.59 | length 57.4
  Top Layer w0.22: v1@28.191,-46.78 v1@28.264,-46.853 ; v1(28.27,-46.847) 29.239,-47.816 45.992,-47.816 46.275,-47.533 46.275,-43.435 47.891,-41.819 v1(47.891,-40.838)
  Bottom Layer w0.22: U4.59@4.03,-43.996 4.03,-42.977 4.452,-42.555 9.444,-42.555 10.894,-44.005 12.907,-44.005 ; 12.201,-44.005 12.907,-44.005 ; v1@28.249,-46.807 25.447,-44.005 12.907,-44.005 ; R24.2@47.058,-40.057 v1@47.848,-40.847 ; v1@47.855,-40.847 R15.1@48.772,-40.847 ; R15.1@48.772,-40.852 R15.1@48.772,-40.847 ; C9.2@48.772,-39.412 R15.1@48.772,-40.847 ; R15.1@48.81,-40.847 R15.1@48.772,-40.847
CLK_0: pad.4 XS2.7 XS4_1.1 | length 49.1
  Top Layer w0.5: XS4_1.1@79.242,-41.176 pad.4@84.058,-41.176
  Bottom Layer w0.4: XS4_1.1@78.221,-41.322 cw(c78.573,-41.674) XS4_1.1@78.573,-41.176 ; XS4_1.1@78.297,-41.13 XS4_1.1@78.348,-41.13 ; XS4_1.1@78.348,-41.258 107.616,-41.258 109.071,-42.713 109.071,-49.461 XS2.7@113.118,-53.508
COM0: JH1.4 U4.13 | length 32.2
  Bottom Layer w0.2: -2.751,-31.826 -2.751,-32.373 ; -2.751,-30.358 -2.751,-29.692 ; U4.13@-0.445,-35.996 -1.349,-35.996 -2.751,-34.594 -2.751,-32.373 ; JH1.4@10.406,-21.412 8.431,-19.437 -0.992,-19.437 -2.751,-21.196 -2.751,-29.692 ; -2.751,-32.373 -2.751,-29.692
COM1: JH1.3 U4.14 | length 28.2
  Bottom Layer w0.2: -2.351,-33.389 -2.351,-33.585 ; -2.351,-30.067 -2.351,-29.009 ; U4.14@-0.445,-35.496 -1.283,-35.496 -2.351,-34.429 -2.351,-33.585 ; JH1.3@7.866,-21.412 6.291,-19.837 -0.826,-19.837 -2.351,-21.362 -2.351,-29.009 ; -2.351,-33.585 -2.351,-29.009
COM2: JH1.2 U4.15 | length 23.9
  Bottom Layer w0.2: -1.951,-29.555 -1.951,-28.573 ; U4.15@-0.445,-34.996 -1.218,-34.996 -1.951,-34.263 -1.951,-28.573 ; JH1.2@5.326,-21.412 4.151,-20.237 -0.66,-20.237 -1.951,-21.527 -1.951,-28.573
  Bottom Layer w0.22: JH1.2@5.326,-21.537 JH1.2@5.326,-21.412
COM3: JH1.1 U4.16 | length 18.3
  Bottom Layer w0.22: U4.16@-0.445,-34.496 -1.082,-34.496 -1.541,-34.038 -1.541,-21.771 -1.182,-21.412 JH1.1@2.786,-21.412 JH1.1@2.786,-21.645
CS: U4.27
DISPKEY: ?.1@-6.625,-36.166 U4.6 | length 7.8
  Bottom Layer w0.2: ?.1@-6.782,-36.206 -5.24,-36.206 -3.978,-37.468 ; -3.88,-37.566 -3.978,-37.468 ; U4.6@-0.445,-39.496 -1.95,-39.496 -3.978,-37.468
EMURX: JR29.1 OP4.4 U4.23 | length 41.7
  Top Layer w0.2: v1@-2.209,-48.433 -2.209,-42.237 -1.441,-41.469 v1(2.499,-41.469)
  Top Layer w0.22: v1@-2.209,-48.433 -2.209,-46.43 ; v1@-2.155,-59.089 v1(-2.155,-54.123)
  Bottom Layer w0.2: v1@2.489,-41.469 2.489,-41.154 4.53,-39.113 U4.23@4.53,-32.521
  Bottom Layer w0.22: JR29.1@-3.57,-61.729 JR29.1@-3.566,-61.729 ; OP4.4@-3.566,-65.74 JR29.1@-3.566,-61.729 ; JR29.1@-3.566,-61.71 JR29.1@-3.566,-61.729 ; v1@-2.114,-59.028 -2.114,-61.471 -2.372,-61.729 JR29.1@-3.566,-61.729 ; v1@-2.068,-54.094 v1@-2.068,-48.451
  other v1: -2.156,-59.075 -2.149,-48.433
EMUTX: JR23.1 U4.22 | length 21
  Top Layer w0.22: v1(1.742,-42.413) 1.742,-45.884 2.367,-46.508 v1(2.367,-48.591)
  Bottom Layer w0.22: v1@1.743,-42.462 1.743,-41.084 4.03,-38.797 U4.22@4.03,-32.521 ; v1@2.327,-48.512 2.381,-48.566 2.381,-51.391 JR23.1@2.933,-51.943
GND: ?.2@-6.625,-34.166 ?.6 C3.2 C4.2 C5.2 C7.2 C8.1 C9.1 C10.1 C11.2 C12.1 C13.2 C14.2 C15.1 C16.2 C22.2 C23.1 C24.2 C30.1 C35.2 C36.1 C69.1 D8.K D10.1 DC7.1 DC8.2 DC10.2 DC13.2 EP1.2 ICP.4 IRC.2 JR25.1 KB.2 LED_IR.K LM1.K OP4.3 P9.2 pad.0@56.179,-54.863 pad.0@-18.234,-14.15 pad.1@8.737,-14.731 pad.2@59.601,-25.135 pad.2@59.642,-47.294 R32.1 R33.2 R34.1 RB.1 SPK.2 T1.C T6.E T7.E T10.E TVS4.1 U2.1 U2.2 U2.3 U2.4 U2.7 U3.4 U3.5 U4.40 U4.63 UP1.4 X1.3 | length 69.4
  Top Layer w0.254: 4.054,-22.021 4.054,-20.783 ; 6.599,-22.132 6.599,-20.893 ; 9.133,-22.231 9.133,-20.992 ; 11.645,-21.949 11.645,-20.711 ; 14.217,-22.032 14.217,-20.794 ; 16.762,-22.016 16.762,-20.777 ; 19.291,-21.999 19.291,-20.76 ; 21.835,-22.005 21.835,-20.766 ; 24.38,-22.071 24.38,-20.832 ; 26.925,-22.076 26.925,-20.838 ; 29.464,-22.065 29.464,-20.827 ; 34.532,-22.038 34.532,-20.799
  Top Layer w0.3: 6.627,-57.184 6.627,-55.618 ; 9.134,-57.227 9.134,-55.661 ; 11.684,-57.248 11.684,-55.682 ; 14.222,-57.216 14.222,-55.65 ; 27.567,-57.718 28.974,-57.718 ; 29.455,-57.238 29.455,-55.671 ; 32.015,-57.216 32.015,-55.65
  Top Layer w0.8: v1@-24.022,-35.122 -23.315,-34.415 v1(-23.315,-32.604) -23.315,-28.39
  Bottom Layer w0.22: U3.4@-23.314,-25.55 -23.314,-24.592 v1@-22.918,-24.196 ; TVS4.1@-22.747,-36.667 TVS4.1@-22.579,-36.667 ; R32.1@-6.066,-46.268 C13.2@-6.066,-44.747 ; C5.2@-6.012,-41.602 C14.2@-6.012,-39.952 ; U4.63@2.03,-43.996 2.03,-46.583 2.262,-46.815 ; 2.167,-46.72 2.262,-46.815 ; v1@3.537,-48.631 3.537,-48.09 2.262,-46.815 ; U4.40@11.03,-37.996 12.603,-37.996 v1@12.905,-38.298 ; C69.1@50.302,-44.092 51,-44.092 v1@51.403,-43.689
  Bottom Layer w0.3: v1(-3.49,-45.264) -2.71,-46.044 C7.2@-2.403,-46.044 ; v1@19.843,-64.787 20.596,-65.541 C16.2@21.031,-65.541
  Bottom Layer w0.4: U3.4@-23.321,-26.175 T10.E@-19.225,-26.175
  Bottom Layer w0.5: RB.1@-25.799,-33.84 -25.799,-34.061 -24.618,-35.242 -24.055,-35.242 -24.055,-35.359 TVS4.1@-22.747,-36.667 ; v1@-23.314,-32.637 U3.5@-23.314,-31.138 ; U2.1@14.367,-49.801 U2.4@14.367,-45.991
  Bottom Layer w1: pad.0@-18.367,-14.177 -15.499,-14.177 ; ?.6@57.839,-44.416 57.839,-45.491 pad.2@59.642,-47.294
  other v1: 19.76,-64.848 6.682,-64.335 3.061,-64.158 -10.418,-63.917 -2.139,-63.926 -8.234,-63.893 -5.021,-63.86 0.786,-63.794 4.728,-63.672 -12.815,-62.986 23.707,-62.883 8.217,-61.883 57.138,-60.735 51.794,-60.702 0.731,-60.68 42.261,-60.685 37.571,-60.19 -9.081,-59.628 59.81,-59.543 -11.471,-59.367 8.775,-58.607 11.245,-58.455 13.639,-58.322 51.728,-58.317 19.748,-57.904 -13.105,-57.695 3.369,-57.629 57.15,-57.63 -8.213,-57.07 -0.229,-57.015 45.402,-56.507 49.107,-56.266 1.953,-56.223 59.904,-55.973 41.924,-55.259 47.069,-55.082 9.24,-54.892 13.829,-54.826 4.827,-53.793 59.426,-52.804 -4.652,-52.162 -0.059,-52.079 27.306,-52.057 46.688,-51.792 -13.291,-51.693 6.369,-50.99 42.527,-50.666 59.672,-50.654 -11.755,-50.207 11.805,-49.411 -4.672,-49.383 57.269,-49.236 21.639,-49.1 -0.003,-49.052 18.046,-48.71 3.522,-48.609 49.759,-48.56 9.408,-47.862 16.817,-47.685 54.988,-47.685 11.735,-46.931 51.149,-46.933 4.763,-46.918 25.653,-46.899 57.251,-46.83 45.12,-46.642 16.806,-46.371 38.628,-46.028 -1.302,-45.905 54.792,-45.671 -6.062,-45.533 21.425,-45.183 35.971,-44.992 -14.103,-44.115 0.491,-43.976 41.036,-43.935 45.007,-43.935 51.47,-43.435 35.186,-42.844 54.316,-42.699 32.702,-42.225 -14.665,-40.97 -6.072,-40.775 5.435,-40.664 36.051,-40.556 40.124,-39.879 9.622,-39.756 54.653,-39.45 7.051,-39.243 21.162,-38.979 2.59,-38.613 12.901,-38.236 44.265,-38.179 -7.239,-38.081 41.675,-38.017 34.322,-37.879 30.987,-37.516 -9.088,-37.464 23.017,-37.456 27.548,-37.383 5.715,-36.926 2.554,-36.404 54.812,-35.963 -24.14,-35.264 26.873,-34.723 2.526,-34.325 5.701,-34.304 -11.936,-34.036 7.792,-33.874 43.823,-33.276 55.407,-33.275 53.234,-33.167 -0.577,-32.955 12.494,-32.69 18.853,-32.651 22.661,-32.371 46.924,-32.332 50.235,-31.783 26.778,-31.473 36.915,-31.34 31.849,-30.947 -0.562,-30.921 4.851,-30.797 44.938,-30.705 51.615,-30.432 54.719,-30.091 21.475,-30.062 18.942,-29.676 10.553,-29.42 47.957,-29.347 -13.34,-28.75 45.104,-28.673 24.514,-28.117 30.127,-28.004 -26.895,-27.947 -19.765,-27.417 20.284,-27.367 16.465,-27.294 35.538,-26.818 48.011,-26.825 32.108,-26.723 39.443,-26.627 45.101,-26.411 14.098,-26.379 -22.035,-26.305 55.02,-25.981 23.423,-25.797 51.637,-25.765 26.698,-25.661 -11.288,-24.313 -23.009,-24.21 -6.952,-24.001 56.172,-23.444 42.829,-22.921 45.36,-22.775 47.899,-22.693 0.759,-22.539 -23.279,-21.926 40.156,-21.874 59.652,-21.755 -18.827,-20.714 -6.524,-20.632 -10.231,-20.442 42.663,-20.288 14.212,-20.169 19.312,-20.1 -21.386,-19.998 48.036,-19.981 -27.594,-19.776 56.087,-19.162 -13.454,-19.009 -6.467,-17.986 47.081,-17.064 31.75,-16.906 59.779,-16.879 28.625,-16.847 3.995,-16.348 55.997,-16.001 11.551,-15.768 23.479,-15.74 18.507,-15.713 52.01,-15.666 -13.215,-15.597 44.183,-15.312 -0.634,-14.065 58.819,-13.909 14.96,-13.877 -20.263,-13.712 30.155,-13.69 54.816,-13.449 20.95,-13.431 41.698,-13.433 -15.492,-13.354 9.525,-13.28 4.029,-13.09 -9.772,-12.894
I1N: FLQ.2@-14.047,-96.716 JR8.1 JT6.1 | length 7.9
  Bottom Layer w0.3: FLQ.2@-13.72,-96.498 -13.227,-96.498 -10.296,-93.566 JR8.1@-7.021,-93.566
I1P: FLQ.1@-9.882,-96.735 JR5.1 JR7.1 | length 7.5
  Bottom Layer w0.3: FLQ.1@-9.864,-96.691 -8.078,-94.904 -6.42,-94.904 -5.289,-93.773 JR5.1@-5.289,-93.623 ; JR5.1@-5.167,-93.746 -5.104,-93.682 JR7.1@-3.627,-93.682
I2P: CTC.1 JR1.2 JR2.2 | length 4.9
  Bottom Layer w0.5: JR1.2@-1.905,-93.621 JR2.2@-1.905,-92.076 ; CTC.1@-1.888,-97.067 JR1.2@-1.888,-93.724
I/O_0: pad.5 XS2.2 XS4_1.4 | length 36.9
  Top Layer w0.4: XS4_1.4@78.923,-31.708 83.92,-31.708 ccw(c83.92,-31.513) pad.5@84.058,-31.651
  Bottom Layer w0.4: XS2.2@75.226,-53.508 XS2.2@75.018,-53.508 76.984,-51.543 76.984,-47.692 74.845,-45.553 74.845,-32.503 75.672,-31.677 pad.5@82.815,-31.677 ; pad.5@83.695,-32.014 pad.5@84.058,-31.651
IC-CLK1: ?.5 R16.2 | length 12.5
  Top Layer w0.22: v1@52.761,-36.303 52.761,-40.657 53.215,-41.111 ?.5@58.087,-41.111
  Bottom Layer w0.22: R16.2@50.242,-36.267 52.832,-36.267 v1(52.839,-36.274)
IC-GND: pad.0@80.051,-45.133 pad.0@82.738,-44.376 XS2.4 XS2.11 XS4_1.6 | length 63.8
  Top Layer w0.203: XS4_1.6@77.247,-44.996 cw(c77.344,-44.996) XS4_1.6@77.275,-44.928 ; XS4_1.6@77.655,-45.108 cw(c78.703,-45.786) 77.82,-44.903 XS4_1.6@78.348,-44.376
  Top Layer w0.4: XS4_1.6@78.348,-44.376 cw(c79.725,-45.754) XS4_1.6@79.725,-43.806 ; pad.0@81.361,-43.806 ccw(c82.738,-42.428) pad.0@82.738,-44.376
  Top Layer w1.2: XS4_1.6@78.683,-44.109 pad.0@82.415,-44.109
  Top Layer w1.5: 77.542,-45.79 XS4_1.6@77.542,-44.861
  Bottom Layer w0.4: XS4_1.6@78.348,-44.376 cw(c80.015,-46.043) XS4_1.6@80.015,-43.686 ; pad.0@81.071,-43.686 ccw(c82.738,-42.019) pad.0@82.738,-44.376
  Bottom Layer w1: XS4_1.6@77.552,-44.848 78.41,-44.848 79.14,-44.118 82.738,-44.118 105.264,-44.118 107.393,-46.247 107.393,-52.476 110.578,-55.662 XS2.11@110.578,-59.858
  Bottom Layer w1.2: XS4_1.6@78.455,-44.113 pad.0@82.888,-44.113
  Bottom Layer w1.5: 77.552,-45.777 XS4_1.6@77.552,-44.848
  other v1: 84.682,-60.59 75.327,-60.345 101.703,-59.515 95.295,-59.479 89.773,-57.709 77.86,-56.688 98.41,-55.868 106.73,-55.214 93.667,-54.24 85.919,-53.775 78.693,-52.438 101.215,-52.235 110.15,-52.172 89.773,-50.427 102.578,-49.307 97.561,-48.753 86.295,-48.322 78.031,-46.736 74.117,-46.559 94.275,-46.451 111.942,-44.792 104.271,-43.46 98.543,-43.031 104.824,-39.741 93.369,-39.64 101.064,-36.485 111.097,-36.271 86.512,-32.95 94.48,-32.247 98.272,-31.611 104.287,-31.316 110.224,-31.13 89.513,-30.484 74.329,-30.281 95.525,-25.902 113.22,-25.883 108.582,-25.845 87.488,-25.75 101.137,-25.177 78.2,-25.001
  other v2: 89.269,-36.472
IC-IO1: ?.2@57.841,-31.608 R45.2 | length 10.4
  Bottom Layer w0.22: R45.2@50.205,-34.687 51.286,-34.687 51.652,-34.321 51.652,-31.858 51.924,-31.586 ?.2@57.889,-31.586 ; ?.2@57.841,-31.526 ?.2@57.853,-31.526
ICRST1: ?.4 R15.2 | length 10.1
  Bottom Layer w0.22: R15.2@50.31,-40.847 R15.2@50.355,-40.847 ; R15.2@50.355,-40.935 51.872,-40.935 52.049,-40.759 52.049,-38.446 52.537,-37.958 54.587,-37.958 ?.4@57.841,-37.958
IR-RXD: C16.1 IRC.1 R23.2 U4.29 | length 70.2
  Top Layer w0.2: v1(7.376,-30.314) 8.586,-30.314 9.07,-30.799 17.498,-30.799 v1@17.548,-30.848
  Bottom Layer w0.2: v1@7.3,-30.391 7.37,-30.461 7.37,-31.277 7.53,-31.436 U4.29@7.53,-32.521
  Bottom Layer w0.22: v1@17.595,-30.914 17.595,-33.404 17.997,-33.807 23.785,-33.807 26.553,-36.574 26.553,-37.816 35.188,-46.451 35.188,-53.39 36.596,-54.799 36.596,-58.333 34.872,-60.057 33.922,-60.057 33.215,-60.763 33.215,-62.205 31.519,-63.901 IRC.1@28.296,-63.901 ; C16.1@22.531,-65.541 22.531,-63.793 28.187,-63.793 IRC.1@28.141,-63.746
  other v1: 17.594,-30.894
IR-TXD: R47.1 U4.30 | length 78.2
  Top Layer w0.22: v1(8.136,-31.052) 8.532,-31.448 16.547,-31.448 v1(16.792,-31.692) v1@16.657,-31.692
  Bottom Layer w0.2: U4.30@8.03,-32.521 v1@8.03,-31.052 ; R47.1@12.389,-64.622 16.508,-64.622 17.717,-63.413 17.717,-61.503 17.962,-61.258 23.299,-61.258 24.817,-62.776 29.454,-62.776 30.063,-62.166 30.063,-61.035 31.452,-59.647 34.702,-59.647 36.186,-58.163 36.186,-54.968 34.778,-53.56 34.778,-46.62 26.143,-37.985 26.143,-36.744 23.616,-34.217 17.268,-34.217 16.845,-33.793 v1@16.845,-31.716
JDQ1A: DR7.2 R34.2 T7.B | length 3.3
  Bottom Layer w0.22: T7.B@-14.675,-48.018 R34.2@-12.994,-48.018 ; R34.2@-12.973,-48.04 DR7.2@-12.973,-46.401
JDQ1B: DR6.1 R33.1 T6.B | length 3.5
  Bottom Layer w0.22: T6.B@-14.717,-55.458 R33.1@-12.813,-55.458 ; R33.1@-12.973,-55.599 DR6.1@-12.973,-54.021
JL12V: BT1.2 D1.A | length 19.1
  Bottom Layer w0.7: D1.A@22.041,-83.373 35.607,-83.373 36.419,-84.186 BT1.2@36.419,-88.592
JLRST: DC1.2 JR27.1 UM2.15 | length 6.7
  Bottom Layer w0.22: UM2.15@-0.891,-82.429 -0.891,-80.428 -0.572,-80.109 -0.415,-80.109 0.466,-79.229 0.466,-77.845 1.342,-76.969 JR27.1@1.525,-76.969
JTAG: RJ6.2 U4.33 | length 42.8
  Bottom Layer w0.22: U4.33@11.03,-34.496 14.211,-34.496 15.139,-33.568 15.139,-26.495 15.494,-26.14 20.69,-26.14 22.606,-24.223 38.66,-24.223 39.346,-23.537 RJ6.2@39.346,-17.752
KEY1: ?.3 R17.2 | length 15.1
  Top Layer w0.22: v1(52.042,-42.489) 52.042,-35.092 52.374,-34.761 ?.3@57.911,-34.761
  Bottom Layer w0.22: R17.2@50.321,-42.49 v1@52.046,-42.49
KEY_0: pad.2@82.758,-34.826 XS2.5 XS4_1.3 | length 59.8
  Top Layer w0.4: v2@108.883,-34.87 108.883,-55.623 XS2.5@113.118,-59.858
  Top Layer w0.6: pad.2@81.644,-34.78 pad.2@84.038,-34.78
  Bottom Layer w0.4: XS4_1.3@78.158,-34.877 cw(c78.281,-35) XS4_1.3@78.281,-34.826 ; XS4_1.3@78.323,-34.883 v2@108.838,-34.883
  other v2: 108.838,-34.845
L: BT1.3 C2.2 CTC.2 DC1.1 DC2.2 DC3.2 DC4.2 DC5.2 JC1.2 JC3.2 JC4.1 JC5.1 JC6.2 JC10.1 JC11.1 JC12.1 JC13.2 JC15.1 JC16.2 JR1.1 JR5.2 JR16.2 JR17.1 JT6.2 L.1 MOV.2 N4.2 OP3.3 OP6.2 pad.0@14.151,-84.861 UM2.8 | length 70.4
  Top Layer w0.5: CTC.2@-4.542,-96.977 -4.542,-93.816
  Top Layer w2: L.1@28.435,-97.014 MOV.2@35.374,-97.014 ; 31.419,-79.687 31.419,-90.127 35.713,-94.421 MOV.2@35.713,-96.92
  Bottom Layer w0.3: JC11.1@-10.218,-91.857 JC11.1@-10.046,-92.029 ; JT6.2@-8.61,-92.029 JT6.2@-8.426,-91.845 ; -6.501,-87.778 UM2.8@-4.757,-87.778 ; JR5.2@-5.131,-91.965 JC3.2@-5.131,-90.47 ; DC5.2@-2.537,-78.609 v1@-2.537,-77.843 ; DC1.1@-0.572,-78.609 v1@-0.572,-77.787 ; JR1.1@-0.161,-93.652 JC1.2@-0.161,-92.032 ; JC5.1@1.587,-83.236 JR17.1@3.384,-83.236 ; JC6.2@1.602,-84.883 JR16.2@3.33,-84.883 ; 3.131,-92.871 JC13.2@3.131,-89.679 ; 7.878,-89.691 8.222,-89.691 8.645,-90.114 12.396,-90.114 13.235,-89.275
  Bottom Layer w0.5: JC11.1@-10.046,-92.029 JT6.2@-8.61,-92.029 ; JT6.2@-8.426,-91.845 JC4.1@-8.426,-90.415 ; v1(0.814,-75.416) 0.818,-75.411 OP3.3@1.694,-74.536
  Bottom Layer w1.5: N4.2@14.173,-86.85 pad.0@14.173,-84.882
  Bottom Layer w2: 15.681,-79.623 31.337,-79.623
  other v1: -11.978,-93.646 3.061,-93.625 -14.495,-93.322 -5.152,-91.306 4.111,-90.582 6.522,-89.141 -12.604,-88.524 -14.573,-88.474 -10.389,-88.179 -6.032,-87.731 -3.264,-85.922 -7.405,-85.893 9.477,-85.663 5.622,-84.496 -0.536,-84.229 -8.633,-83.913 -11.504,-83.707 -14.49,-83.658 4.649,-83.095 -5.962,-82.488 7.834,-81.794 14.064,-81.618 -8.433,-80.374 31.415,-80.094 -12.451,-79.792 31.395,-79.152 6.726,-78.904 15.278,-78.714 -13.579,-78.325 -8.37,-78.18 -2.546,-77.794 -0.594,-77.809 4.077,-77.617 8.673,-77.258 -10.646,-76.041 14.496,-75.566 -13.509,-75.406 7.34,-75.341